# Altium PCB esp12F.PcbDoc
Units mm, origin at the board's own origin, x right, y up, seen from the top; angles counter-clockwise.
Board outline 60.36 x 50.25 mm, 2 copper layers (Top Layer, Bottom Layer); 14 components, 14 nets, 54 pads, 2 vias.
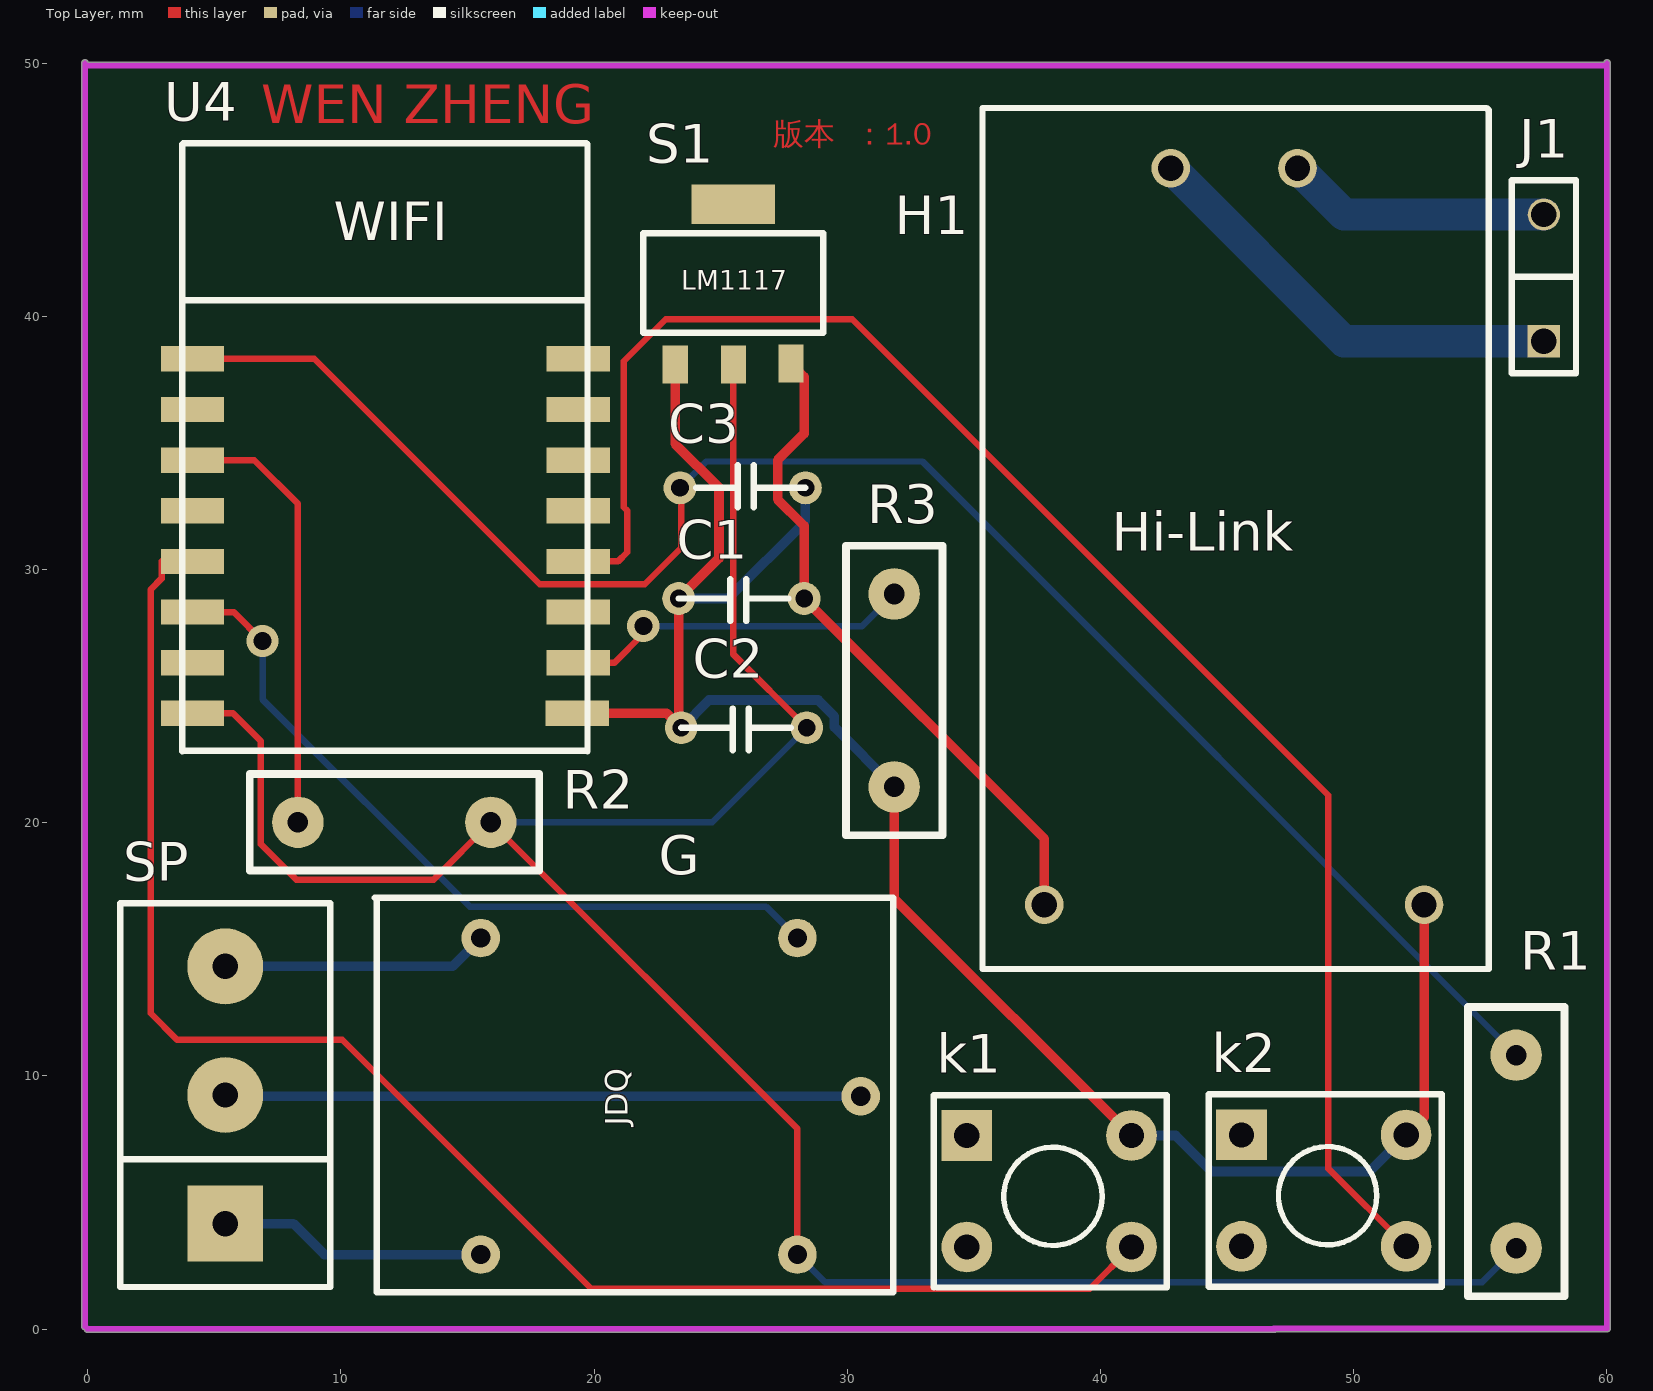
[diagram p0: Top Layer view]
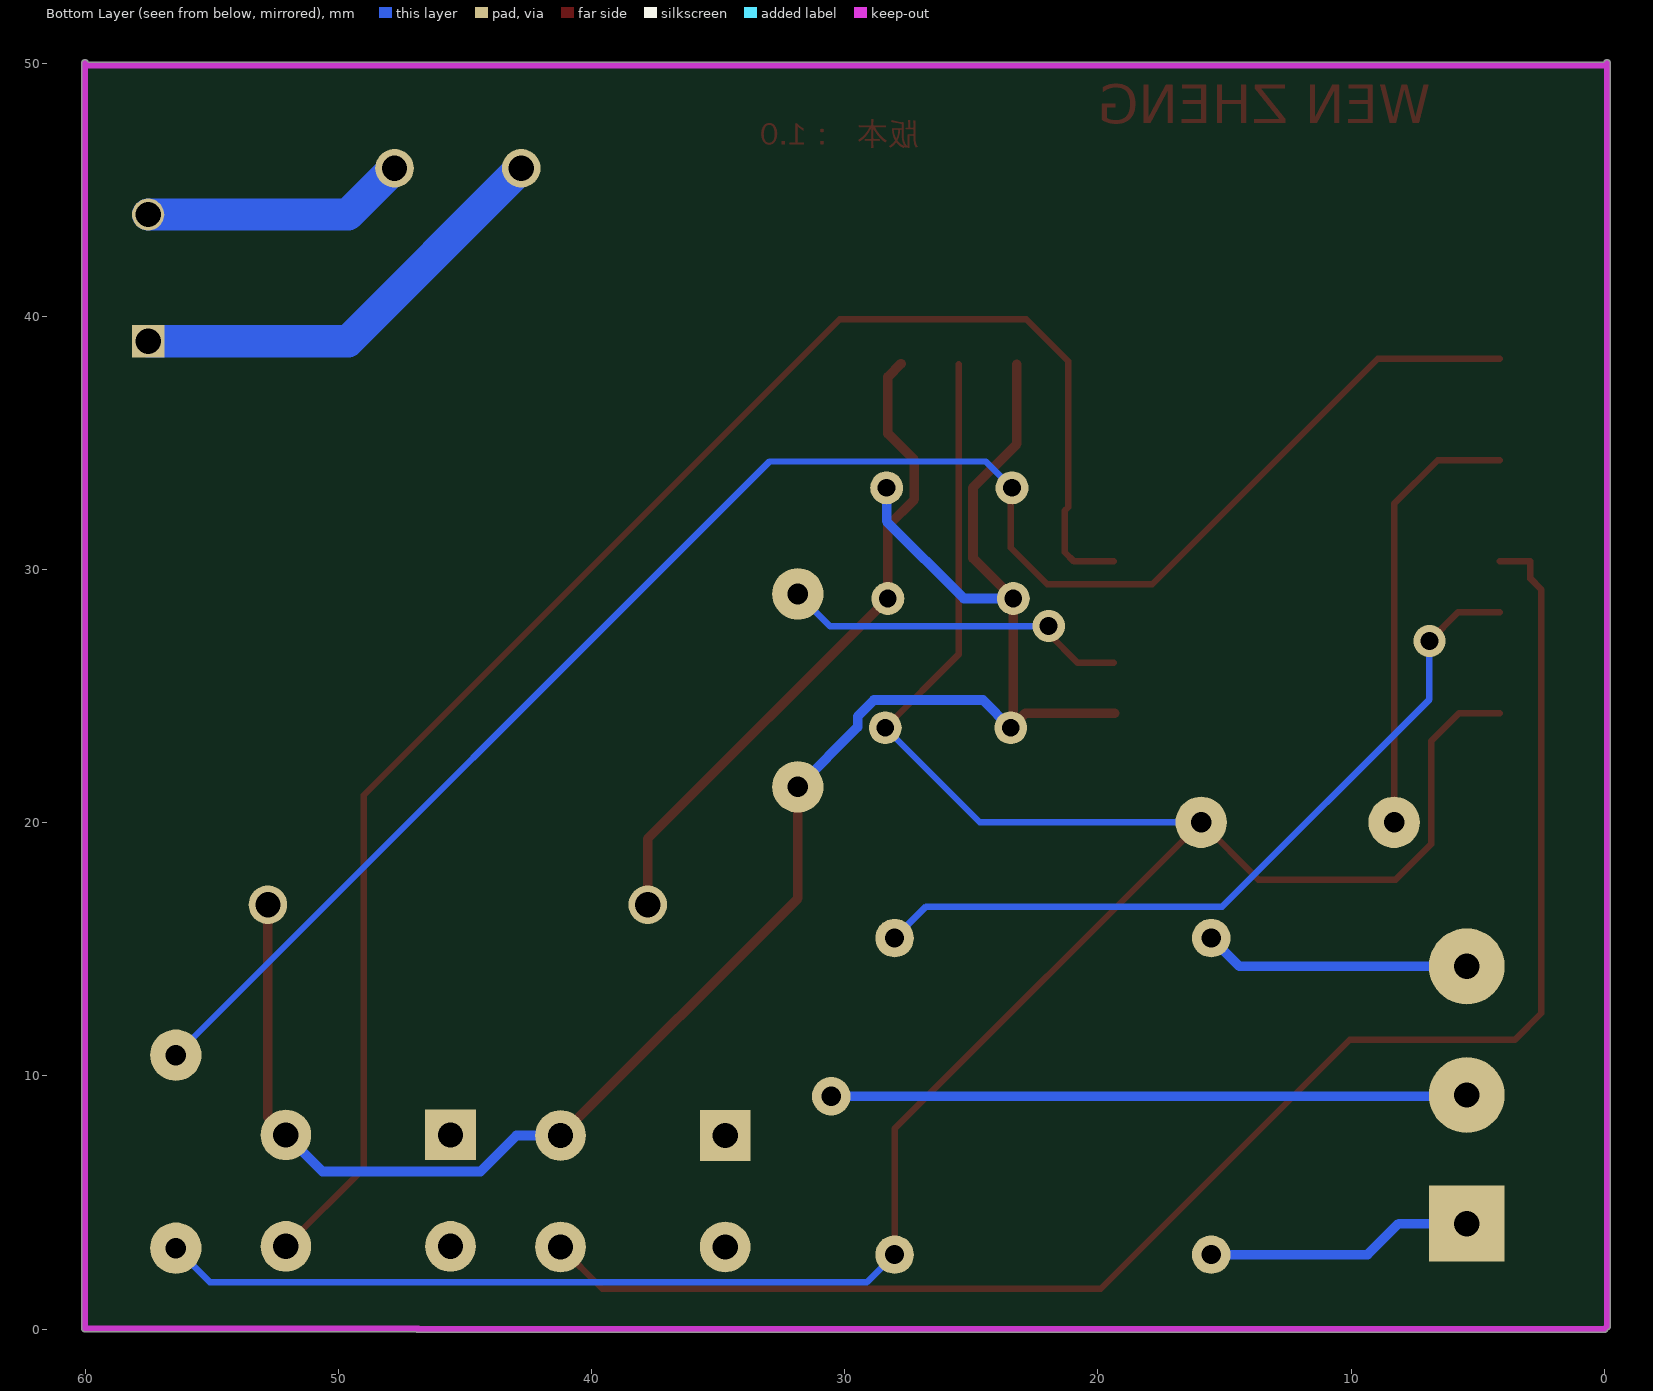
[diagram p1: Bottom Layer view, seen from below]
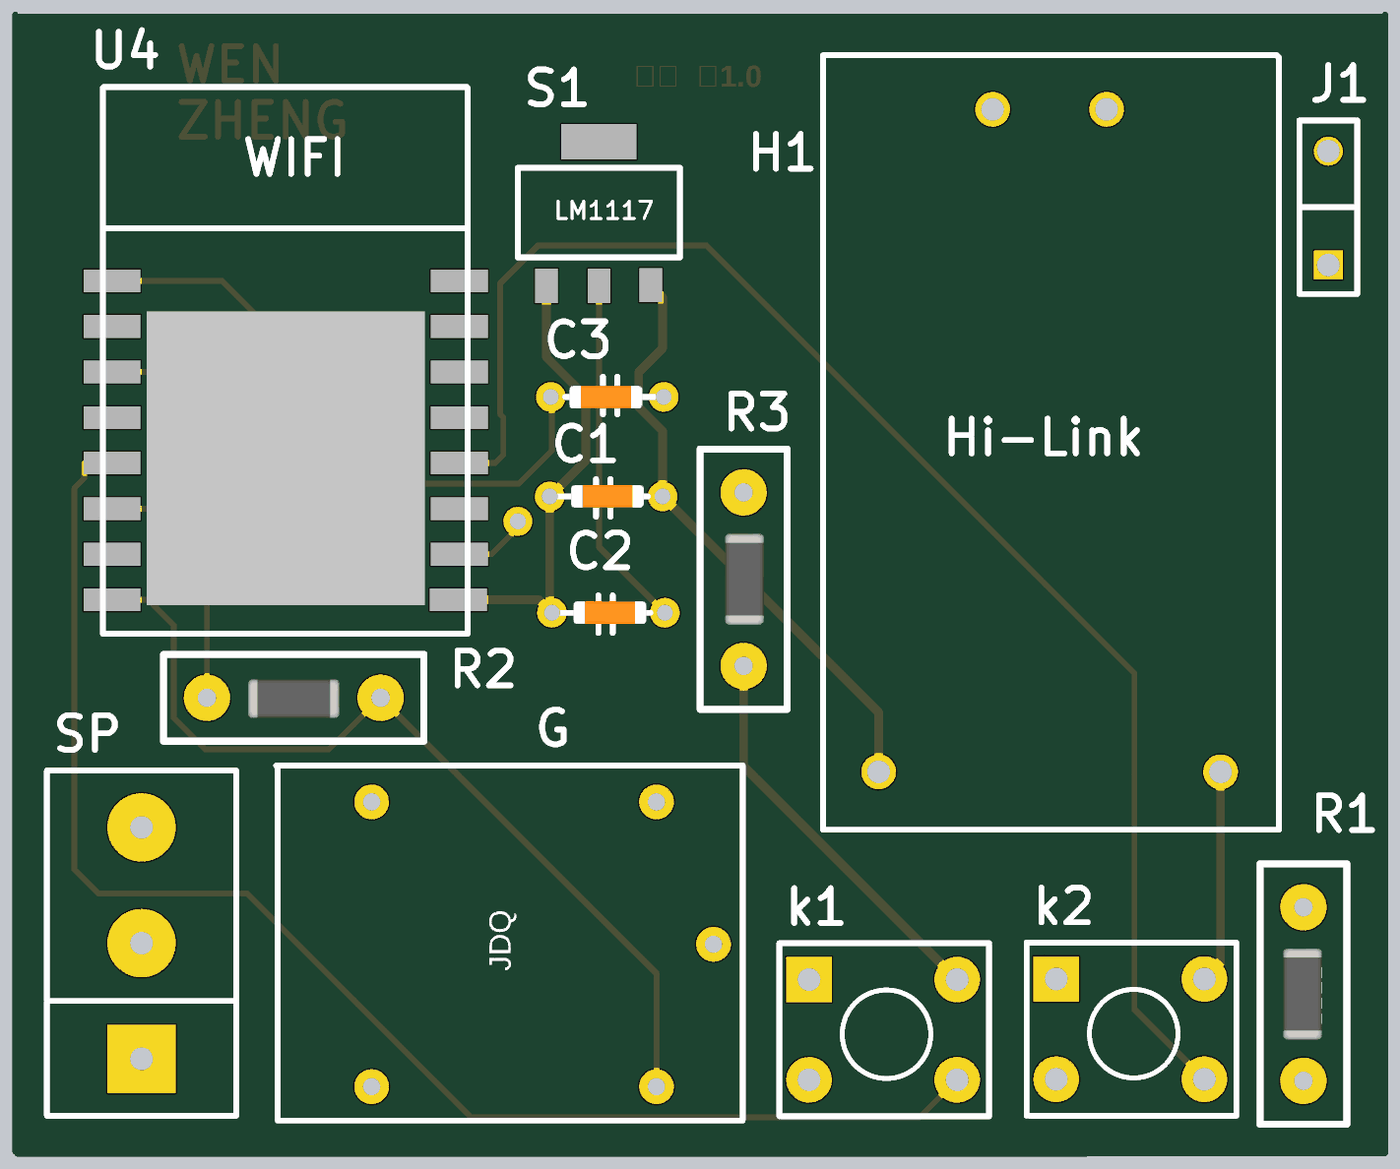
[diagram p2: 3D render of the assembled board from above, using the file's embedded part models]

## Layer stack, top to bottom
Top Solder: solder mask 0.0102, Solder Resist, Dk 3.5
Top Layer: signal copper 0.0356
Dielectric 1: dielectric 0.32, FR-4, Dk 4.8
Bottom Layer: signal copper 0.0356
Bottom Solder: solder mask 0.0102, Solder Resist, Dk 3.5

## Board outline
-0.125,-0.024 ccw(c0,0) 0,-0.127 46.863,-0.127 ccw(c46.863,0) 46.939,-0.102 60,-0.102 ccw(c60,0.025) 60.127,0.025 60.127,50 ccw(c60,50) 59.879,50.038 0.02,50.038 ccw(c-0.102,50) -0.229,50 -0.229,0.102 ccw(c-0.102,0.102)

## Design rules (kind name [scope] priority, off if disabled: settings)
Clearance [All] p1: gap=0.254
PolygonConnect [isvia] p1: connectstyle=Direct reliefconductorwidth=0.254 reliefentries=4 polygonreliefangle="90 Angle" airgapwidth=0.254
RoutingVias [All] p1: holewidth=0.711 width=1.27 viastyle="Through Hole" minholewidth=0.711 minwidth=1.27 maxholewidth=0.711 maxwidth=1.27
SolderMaskExpansion [All] p1: expansion=0.064
Width power [InNetClass('power')] p1: maxlimit=1.524 minlimit=0.381 preferedwidth=0.381
Width [All] p2: maxlimit=0.254 minlimit=0.254 preferedwidth=0.254
30 further rules are at their usual default settings.

## Classes and differential pairs
net class POWER: 5V GND NetG_1 NetG_2 NetG_4 NetH1_1 NetH1_2

## Components (designator, comment, footprint, x,y, rotation, side; value= is the part's Value field where it differs from the comment)
C1 "CAP" CB2 28.296,28.854 r180 top
C2 "CAP" CB2 28.397,23.749 r180 top
C3 "CAP" CB2 23.393,33.223 r0 top
G "jidianqi" JIDIANQI 15.531,2.945 r90 top
H1 "HI-LINK" HI-LINK 45.277,16.764 r0 top
J1 "POWER" SIP02 57.506,39.014 r90 top
k1 "switch" SWITCH 34.722,7.645 r0 top
k2 "switch" SWITCH 45.568,7.671 r0 top
R1 "RES" RAD0.3 56.413,7.01 r270 top
R2 "RES" RAD0.3 12.116,20.015 r0 top
R3 "RES" RAD0.3 31.852,25.223 r90 top
S1 "AMS1117" LM1117 25.248,41.25 r0 top
SP "SPI3" SIPX03 5.436,4.166 r90 top
U4 "MCU" ESP12F 11.76,31.318 r0 top

## Footprints (in the part's own frame and the unit in brackets; to place one, negate y for a bottom-side part, rotate by r counter-clockwise, add the part's x,y. Pads: shape width x height; smd on the part's side, far side on the other; paste and mask are expansions set on the pad)
CB2 [mm]
  round 1.3 hole 0.7: 1(0,0) 2(4.953,0)
  silkscreen extent 0.64,-0.76 4.95,0.89, body extent 0.81,-0.51 4.01,0.49, height 1.3
ESP12F [mm]
  rect 2.5x1 smd: 1(7.62,7) 2(7.62,5) 3(7.62,3) 4(7.62,1) 5(7.62,-1) 6(7.62,-3) 7(7.62,-5) 8(7.58,-7) 9(-7.62,-7) 10(-7.62,-5) 11(-7.62,-3) 12(-7.62,-1) 13(-7.62,1) 14(-7.62,3) 15(-7.62,5) 16(-7.62,7)
  silkscreen extent -8.02,-8.49 7.98,15.51, body extent -6.1,-7.25 6.1,5.65, height 1.74
HI-LINK [mil]
  round 60 hole 39.37: 1(-98.43,1145) 2(98.43,1145) 3(-295.28,0) 4(295.28,0)
  silkscreen extent -391,-100 396,1239, body extent -390,-100 395,1235, height 591
JIDIANQI [mil]
  round 60 hole 30: 1(246.06,-590.55) 2(0,0) 3(0,-492.13) 4(492.13,0) 5(492.13,-492.13)
  silkscreen extent -59,-641 555,165, body extent -60,-640 555,160, height 591
LM1117 [mm]
  rect 1x1.5 smd: 1(-2.043,-3.148) 2(0.256,-3.148) 3(2.53,-3.123)
  rect 3.3x1.549 smd: 4(0.254,3.175)
  silkscreen extent -3.3,-1.91 3.81,2.03, body extent -3.3,-1.91 3.81,2.03, height 2
RAD0.3 [mil]
  round 80 hole 32: 1(-150,0) 2(150,0)
  silkscreen extent -225,-75 225,75, body extent -79,-35 79,32, height 69
SIP02 [mm]
  rect 1.27x1.27 hole 1: 1(0,0)
  round 1.27 hole 1: 2(5,0)
  silkscreen extent -1.27,-1.27 6.35,1.27
SIPX03 [mm]
  rect 3x3 hole 1: 1(0,0)
  round 3 hole 1: 2(5.08,0) 3(10.16,0)
  silkscreen extent -2.5,-4.15 12.66,4.15
SWITCH [mm]
  rect 2x2 hole 1: 1(0,0)
  round 2 hole 1: 2(0,-4.4) 3(6.5,-4.4) 4(6.5,0)
  silkscreen extent -1.3,-6 7.9,1.6, body extent 0.13,-4.7 6.73,0.25, height 4

## Part data
J1: library part CON2
U4: library part ESP12F

## Via types
v1: diameter 1.27, hole 0.711, Top Layer to Bottom Layer, 2 vias

## Nets (pads, with @x,y where several pads share a name; then routed paths per layer and width w, separated by ;. In a path a pad name is that pad's centre, name@x,y a point inside that pad or via, vN(x,y) a via of type N, cw(c..) or ccw(c..) an arc to the next point about the centre after c; other vN are vias at no path point)
3.3V: C2.1 G.3 R1.2 R2.2 S1.2 U4.9 | length 98.9
  Top Layer w0.254: U4.9 5.743,24.318 6.845,23.216 6.845,19.152 8.242,17.755 13.665,17.755 R2.2 28.031,7.91 G.3 ; S1.2 25.504,26.643 C2.1
  Bottom Layer w0.254: R2.2 24.663,20.015 C2.1 ; G.3 29.121,1.854 55.067,1.854 R1.2
5V: C1.1 H1.3 S1.3 | length 26.4
  Top Layer w0.381: S1.3 28.296,37.609 28.296,35.361 27.252,34.318 27.252,32.77 28.296,31.726 C1.1 37.777,19.373 H1.3
GND: C1.2 C2.2 C3.2 H1.4 k1.4 k2.4 R3.1 S1.1 U4.8 | length 77.5
  Top Layer w0.381: U4.8 22.875,24.318 C2.2@23.343,23.851 ; S1.1 23.204,34.96 24.932,33.232 24.932,30.444 C1.2 C2.2@23.343,23.851 ; C2.2 C2.2@23.343,23.851 ; R3.1 31.852,17.016 k1.4 ; k2.4 k2.4@52.118,7.722 ; k2.4@52.118,7.341 k2.4@52.118,7.722 ; H1.4 52.777,8.381 k2.4@52.118,7.722
  Bottom Layer w0.381: C1.2 25.298,28.854 28.346,31.902 C3.2 ; C2.2 24.539,24.843 28.851,24.843 29.492,24.202 29.492,23.773 R3.1 ; k1.4 42.964,7.645 44.383,6.226 50.623,6.226 k2.4
NetC3_1: C3.1 R1.1 U4.16 | length 69.2
  Top Layer w0.254: U4.16 8.951,38.318 17.856,29.413 21.996,29.413 23.441,30.858 23.441,32.7 23.393,32.7 C3.1
  Bottom Layer w0.254: C3.1 24.435,34.265 32.969,34.265 R1.1
NetG_1: G.1 SP.2 | length 25.1
  Bottom Layer w0.381: SP.2 5.486,9.195 G.1
NetG_2: G.2 SP.1 | length 10.6
  Bottom Layer w0.381: SP.1 8.128,4.166 9.349,2.945 G.2
NetG_4: G.4 SP.3 | length 10.6
  Bottom Layer w0.381: SP.3 14.412,14.326 G.4
NetG_5: G.5 U4.11 | length 30.6
  Top Layer w0.254: U4.11 5.769,28.318 v1(6.909,27.178)
  Bottom Layer w0.254: v1(6.909,27.178) 6.909,24.867 15.088,16.688 26.788,16.688 G.5
NetH1_1: H1.1 J1.1 | length 17.6
  Bottom Layer w1.27: H1.1 49.61,39.014 J1.1
NetH1_2: H1.2 J1.2 | length 10.5
  Bottom Layer w1.27: H1.2 49.61,44.014 J1.2
Netk1_3: k1.3 U4.12 | length 63.2
  Top Layer w0.254: U4.12 2.921,30.318 2.921,29.642 2.489,29.21 2.489,12.471 3.531,11.43 10.058,11.43 19.888,1.6 39.577,1.6 k1.3
Netk2_3: k2.3 U4.5 | length 65
  Top Layer w0.254: U4.5 20.946,30.318 21.311,30.683 21.311,32.327 21.177,32.461 21.177,38.22 22.835,39.878 30.201,39.878 48.997,21.082 48.997,6.342 k2.3
NetR2_1: R2.1 U4.14 | length 17.5
  Top Layer w0.254: U4.14 6.579,34.318 8.306,32.591 R2.1
NetR3_2: R3.2 U4.7 | length 13.8
  Top Layer w0.254: U4.7 20.806,26.318 21.946,27.457 v1(21.946,27.762)
  Bottom Layer w0.254: v1(21.946,27.762) 30.581,27.762 R3.2
pads on no net: k1.1 k1.2 k2.1 k2.2 S1.4 U4.1 U4.2 U4.3 U4.4 U4.6 U4.10 U4.13 U4.15

## Keep-outs
Keep-Out Layer:
  lines w0.254: -0.102,49.911 49.302,49.911 60,49.911 ; -0.102,50 -0.102,0.102 0,0 46.863,0 46.838,0.025 60,0.025 60,50

## Other copper
Top Layer:
  text "WEN ZHENG" at 6.858,47.625 h1.52
  text "版本  ：1.0" at 27.076,46.482 h1.52

## Text inside footprints (layer, text, board x,y; h text height)
G: Top Overlay "JDQ" at 21.627,8.025 h1.52 r90
H1: Top Overlay "Hi-Link" at 40.451,30.734 h1.52
S1: Top Overlay "LM1117" at 23.448,41.05 h0.76
U4: Top Overlay "WIFI" at 9.728,43.002 h1.52